# Altium PCB MotherBoardPCB.PcbDoc
Units mm, origin at the board's own origin, x right, y up, seen from the top; angles counter-clockwise.
Board outline 50 x 50 mm, 2 copper layers (Top Layer, Bottom Layer); 36 components, 30 nets, 147 pads, 50 vias.
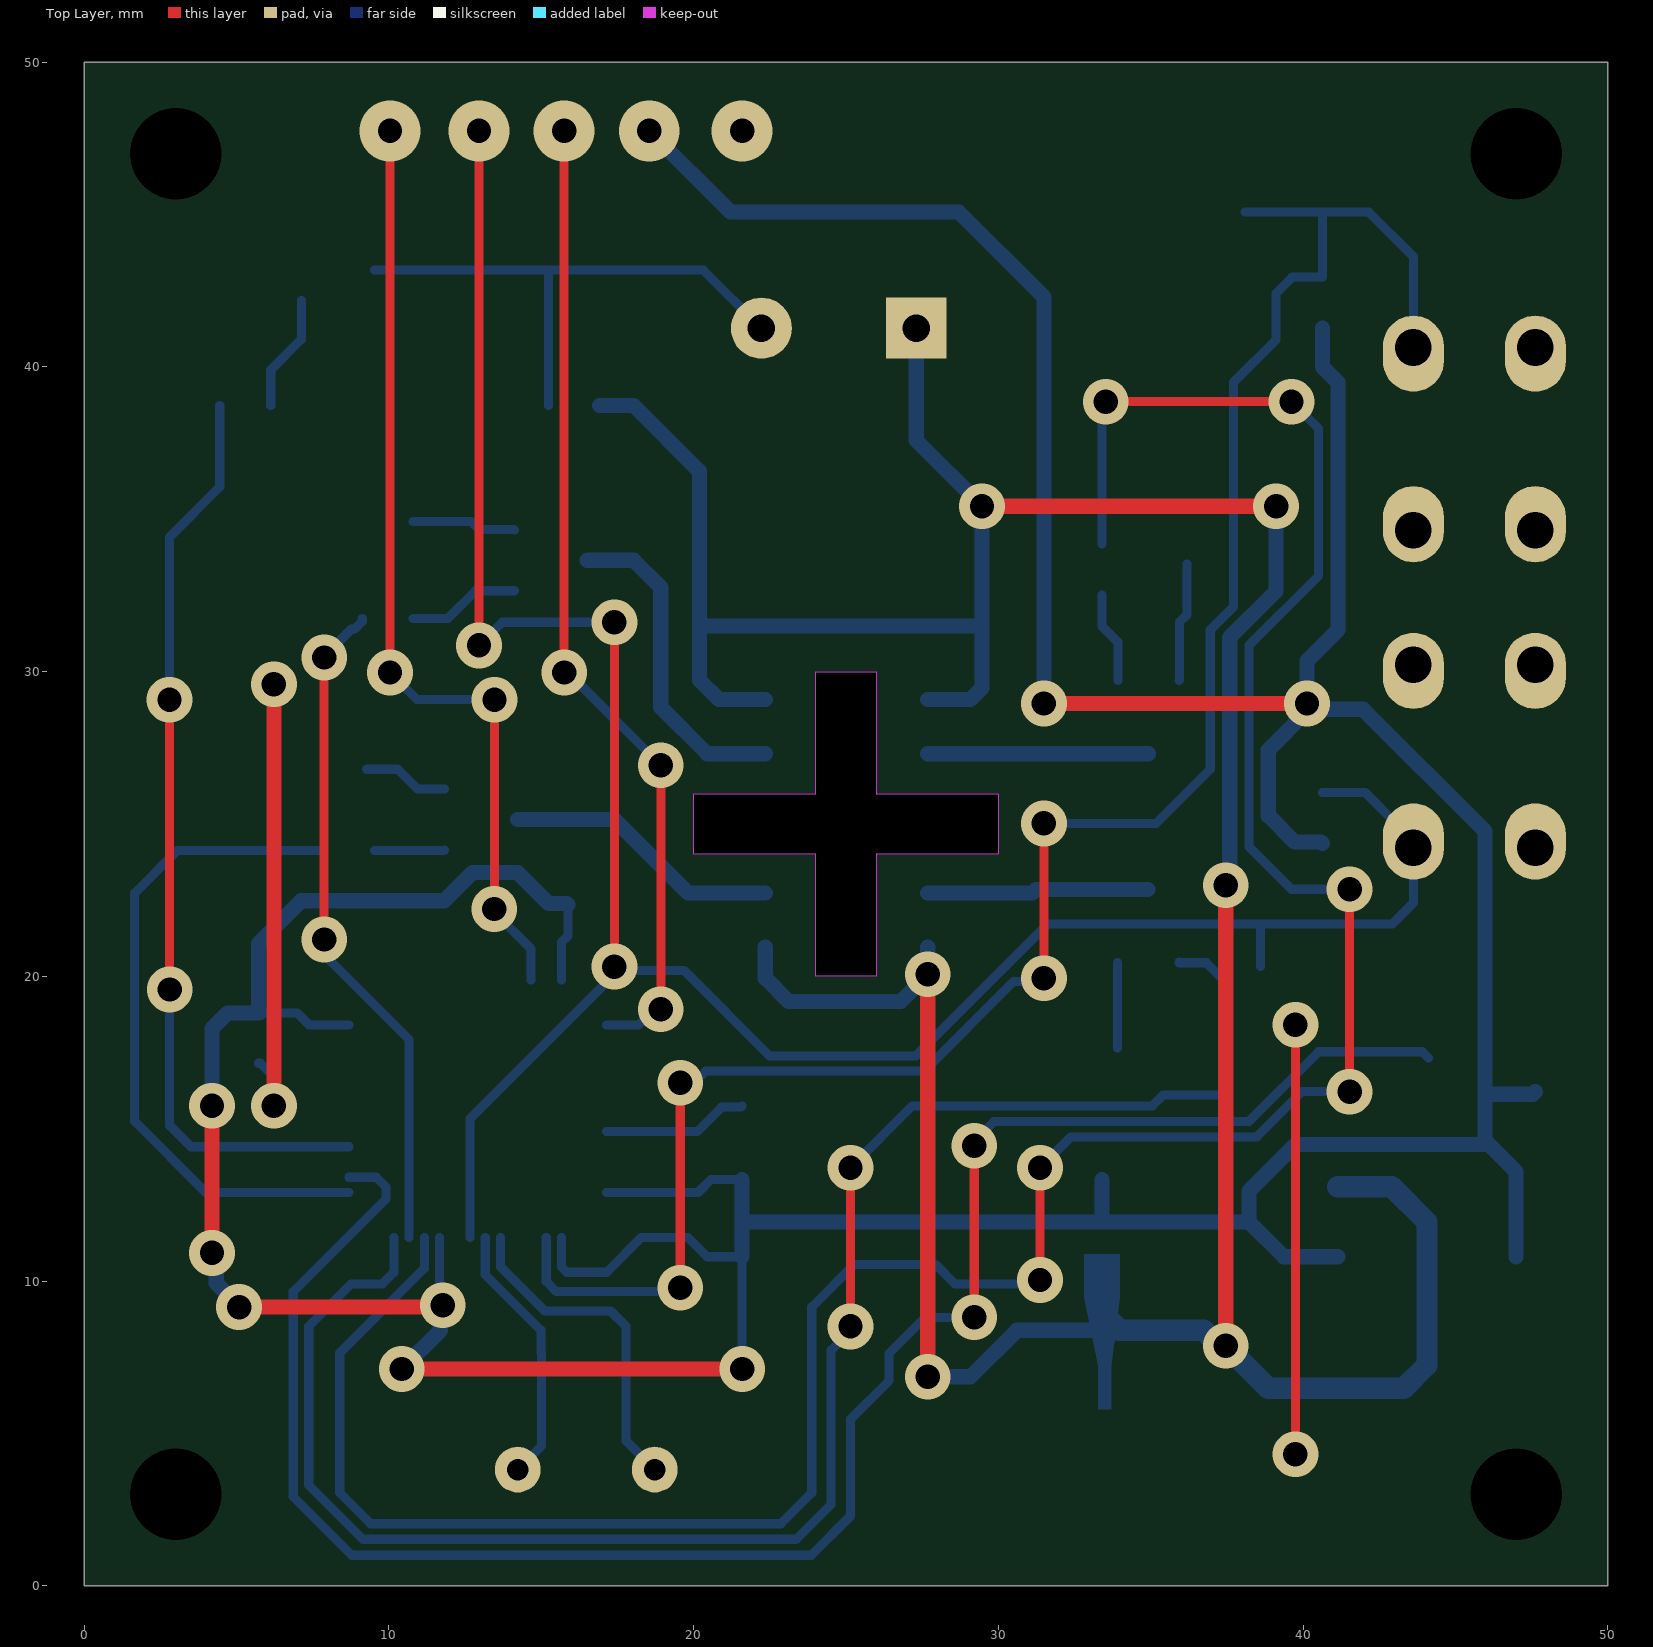
[diagram p0: Top Layer view]
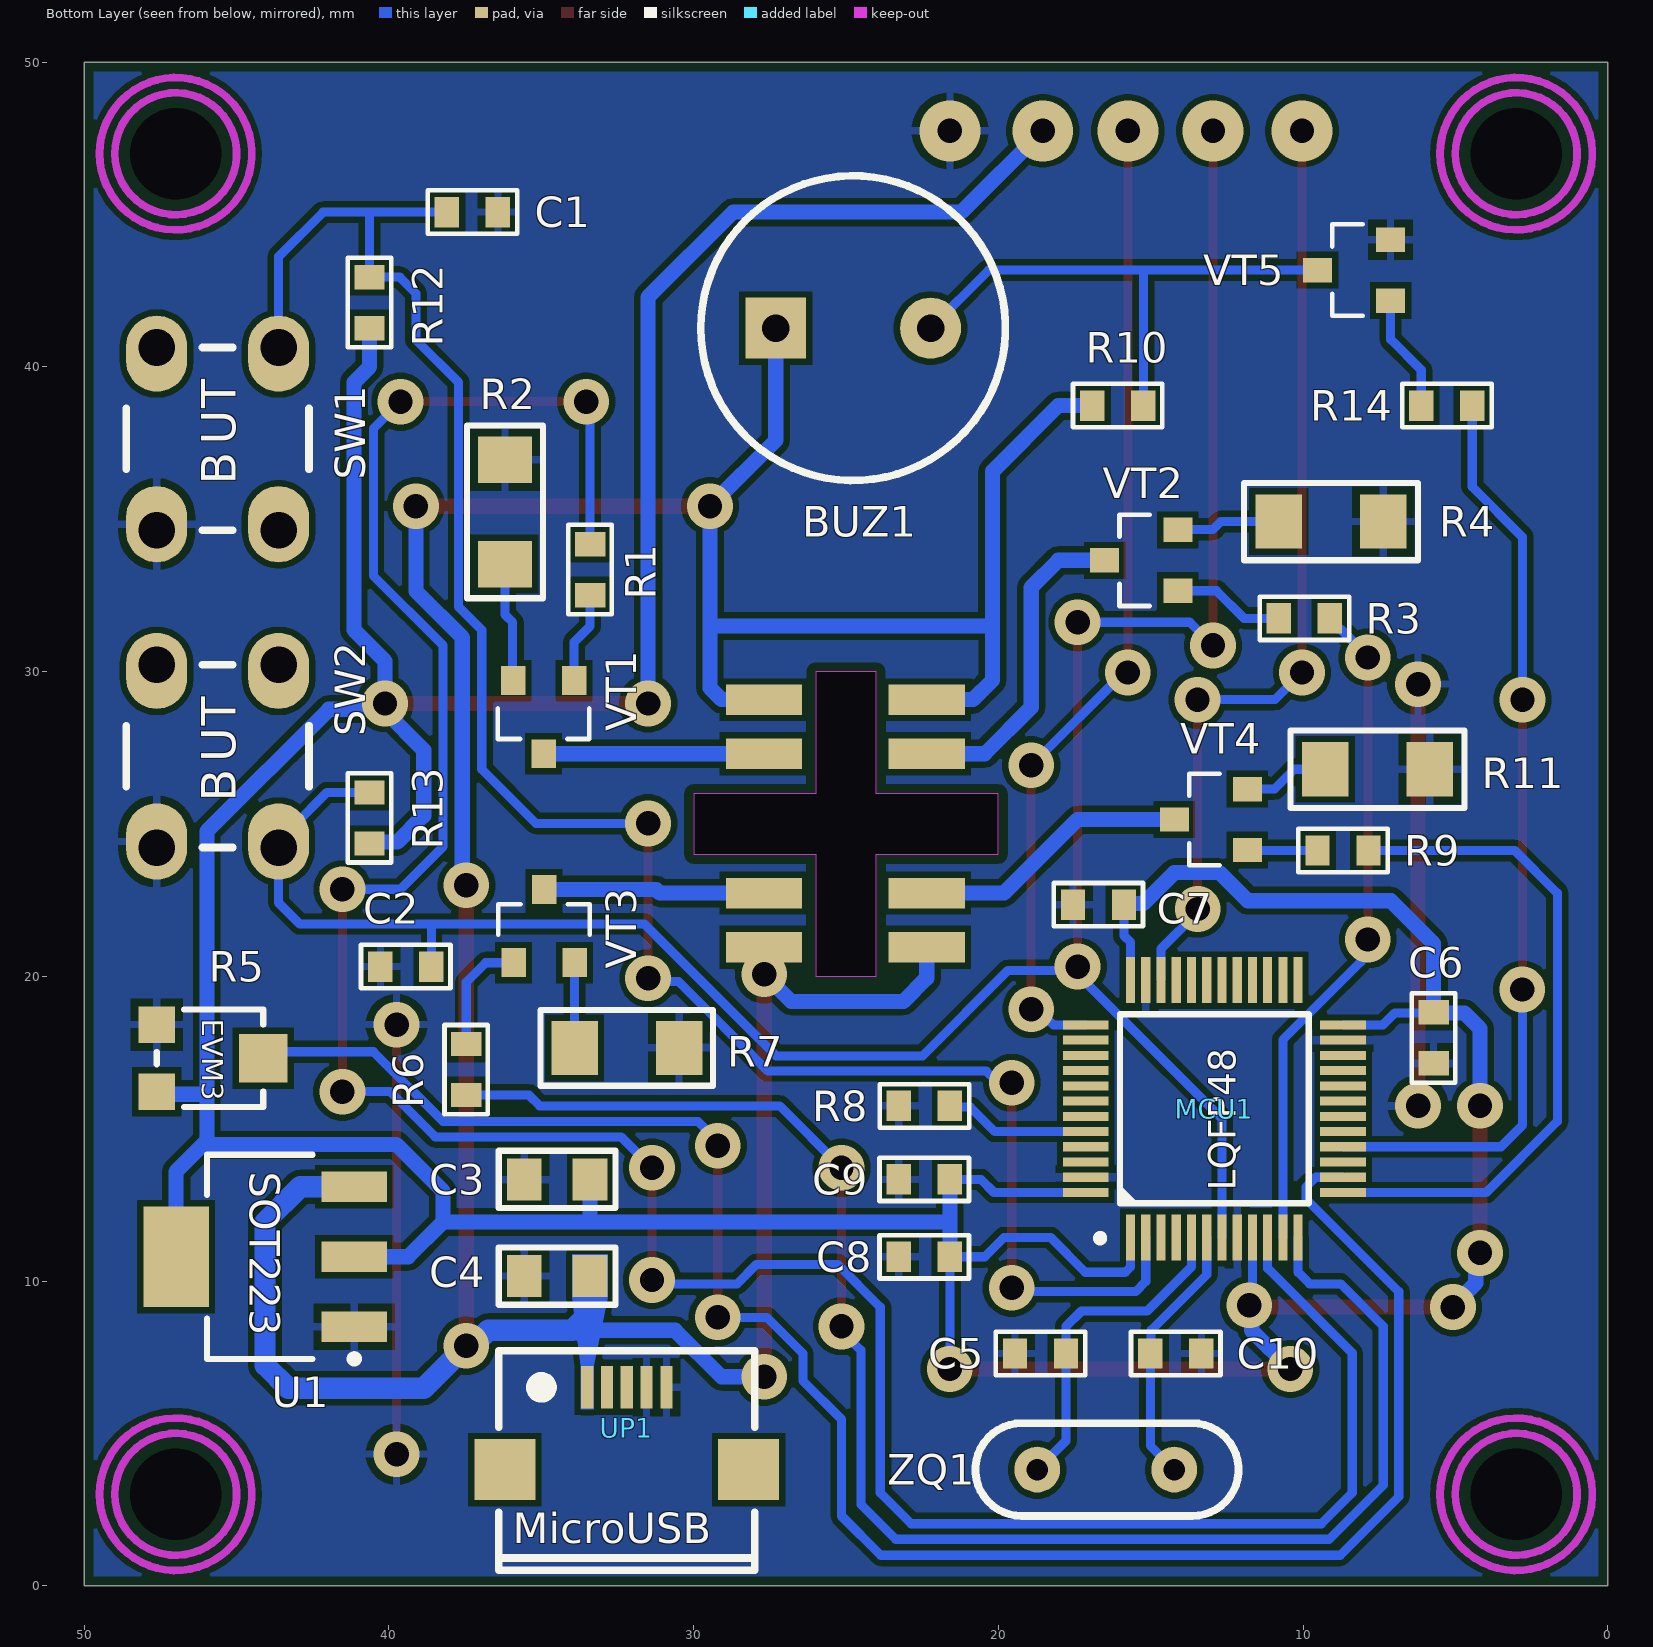
[diagram p1: Bottom Layer view, seen from below]

## Layer stack, top to bottom
Top Solder: solder mask 0.0102, Solder Resist, Dk 3.5
Top Layer: signal copper 0.0356
Dielectric 1: dielectric 0.32, FR-4, Dk 4.8
Bottom Layer: signal copper 0.0356
Bottom Solder: solder mask 0.0102, Solder Resist, Dk 3.5

## Board outline
0,0 0,50 50,50 50,0
cut-out: 24,20 24,24 20,24 20,26 24,26 24,30 26,30 26,26 30,26 30,24 26,24 26,20

## Design rules (kind name [scope] priority, off if disabled: settings)
BoardOutlineClearance [All] p1: gap=0.3 ignorepadtopadclearanceinfootprint=FALSE
Clearance [All] p1: gap=0.2 ignorepadtopadclearanceinfootprint=FALSE
FanoutControl Fanout_LCC [All] p1 off: bgadir=Out bgaviamode=Centered fanoutstyle=Auto fanoutdirection=Alternating viagrid=0.025 // Protel DXP Scope 1 Expression Was: IsLCC   Fanout_LCC (Default Rule)
FanoutControl Fanout_BGA [All] p2 off: bgadir=Out bgaviamode=Centered fanoutstyle=Auto fanoutdirection=Alternating viagrid=0.025 // Protel DXP Scope 1 Expression Was: IsBGA   Fanout_BGA (Default Rule)
FanoutControl Fanout_SOIC [All] p3 off: bgadir=Out bgaviamode=Centered fanoutstyle=Auto fanoutdirection=Alternating viagrid=0.025 // Protel DXP Scope 1 Expression Was: IsSOIC   Fanout_SOIC (Default Rule)
FanoutControl Fanout_Default [All] p4: bgadir=Out bgaviamode=Centered fanoutstyle=Auto fanoutdirection=Alternating viagrid=0.025 // Fanout_Default (Default Rule)
FanoutControl Fanout_Small [All] p5 off: bgadir=Out bgaviamode=Centered fanoutstyle=Auto fanoutdirection=Alternating viagrid=0.025 // Protel DXP Scope 1 Expression Was: (CompPinCount < 5)   Fanout_Small (Default Rule)
HoleSize [All] p1: absolutevalues=TRUE maxlimit=10 minlimit=0.025 maxpercent=80.000 minpercent=20.000
MinimumSolderMaskSliver [All] p1: minsoldermaskwidth=0
PolygonConnect [All] p1: connectstyle=Relief reliefconductorwidth=0.254 reliefentries=4 polygonreliefangle="90 Angle" airgapwidth=0.254
RoutingVias [All] p1: holewidth=0.8 width=1.5 viastyle="Through Hole" minholewidth=0.8 minwidth=1.5 maxholewidth=0.8 maxwidth=2
SilkToSilkClearance [All] p1: silktosilkclearance=0.1
SilkToSolderMaskClearance [All] p1 off: minsilkscreentomaskgap=0.254 clearancetoexposedcopper=TRUE // Protel DXP Scope 1 Expression Was: IsPad
SolderMaskExpansion [All] p1: expansion=0.102 istentingtop=FALSE
Width [All] p1: maxlimit=0.7 minlimit=0.3 preferedwidth=0.5
21 further rules are at their usual default settings.

## Components (designator, comment, footprint, x,y, rotation, side; value= is the part's Value field where it differs from the comment)
BUZ1 "BUZZER" BUZZER-5.08MM-D10.5MM 27.305,41.275 r180 bottom
C1 "100nF" C0603 36.425,45.085 r0 bottom
C2 "100nF" C0603 40.283,20.32 r180 bottom
C3 "100nF" C0805 35.56,10.16 r180 bottom
C4 "100nF" C0805 35.56,13.335 r180 bottom
C5 "32pF" C0603 17.78,7.62 r0 bottom
C6 "100nF" C0603 5.715,17.145 r90 bottom
C7 "100nF" C0603 17.55,22.352 r180 bottom
C8 "100nF" C0603 23.265,10.795 r180 bottom
C9 "100nF" C0603 23.265,13.335 r180 bottom
C10 "32pF" C0603 15.01,7.62 r180 bottom
MCU1 "STM32F103C8T6" LQFP48 12.91,15.655 r90 bottom
R1 "10K" R0603#1 33.401,34.187 r270 bottom
R2 "68" R1206 36.195,33.528 r90 bottom
R3 "10K" R0603#1 9.12,31.75 r0 bottom
R4 "68" R1206 10.795,34.925 r180 bottom
R5 "10K" EVM3 47.625,18.415 r270 bottom
R6 "10K" R0603#1 37.465,16.105 r90 bottom
R7 "68" R1206 33.909,17.653 r180 bottom
R8 "1K" R0603#2 21.587,15.748 r0 bottom
R9 "10K" R0603#2 7.847,24.13 r0 bottom
R10 "1K" R0603#1 16.915,38.735 r180 bottom
R11 "68" R1206 9.271,26.797 r180 bottom
R12 "10K" R0603#1 40.64,42.95 r270 bottom
R13 "10K" R0603#1 40.64,26.035 r270 bottom
R14 "1K" R0603#1 4.445,38.735 r0 bottom
SW1 "Custom" BUT-6.5X4.5MM 47.625,34.64 r90 bottom
SW2 "Custom" BUT-6.5X4.5MM 47.625,24.226 r90 bottom
U1 "LM1117MPX-3.3" SOT-223 44.065,10.795 r0 bottom
UP1 "Type A" USB-MICRO-F 33.495,6.51 r180 bottom
VT1 "2N2222" SOT-23-123 34.925,27.305 r270 bottom
VT2 "2N2222" SOT-23-123 16.51,33.655 r0 bottom
VT3 "2N2222" SOT-23-123 34.909,22.847 r90 bottom
VT4 "2N2222" SOT-23-123 14.224,25.146 r0 bottom
VT5 "2N2222" SOT-23-123 9.525,43.18 r0 bottom
ZQ1 "8MHz" HC-49 18.724,3.81 r180 bottom

## Footprints (in the part's own frame and the unit in brackets; to place one, negate y for a bottom-side part, rotate by r counter-clockwise, add the part's x,y. Pads: shape width x height; smd on the part's side, far side on the other; paste and mask are expansions set on the pad)
BUT-6.5X4.5MM [mm]
  oval 2.5x2 hole 1.2 copper offset 0.2,0: 1(0,0) 2(0,-4)
  oval 2.5x2 hole 1.2 copper offset -0.2,0: 3(6,-4) 4(6,0)
  silkscreen extent 0,-5 6,1, body extent -0.2,-5 6.2,1, height 4.6
BUZZER-5.08MM-D10.5MM [mm]
  rect 2x2 hole 0.9: 1(0,0)
  round 2 hole 0.9: 2(5.08,0)
  silkscreen extent -2.46,-5 7.54,5, body extent -2.76,-5.3 7.84,5.3, height 6
C0603 [mm]
  rect 0.8x1 smd: 1(0,0) 2(1.675,0)
  silkscreen extent -0.64,-0.71 2.3,0.71, body extent -0.05,-0.45 1.75,0.45, height 0.8
C0805 [mil]
  rect 45x54 smd: 1(0,0) 2(85,0)
  silkscreen extent -33,-37 118,37, body extent 1,-24 84,24, height 35
EVM3 [mm]
  rect 1.2x1.2 smd: 1(0,0) 3(2.2,0)
  rect 1.6x1.6 smd: 2(1.1,3.5)
  silkscreen extent -0.5,0 2.7,3.5
HC-49 [mm]
  round 1.5 hole 0.7: 1(0,0) 2(4.5,0)
  silkscreen extent -2.02,-1.52 6.6,1.52, body extent -2.15,-1.65 6.73,1.65, height 2.26
LQFP48 [mm]
  rect 1.5x0.3 smd mask+0.076: 1(-4.225,2.75) 2(-4.225,2.25) 3(-4.225,1.75) 4(-4.225,1.25) 5(-4.225,0.75) 6(-4.225,0.25) 7(-4.225,-0.25) 8(-4.225,-0.75) 9(-4.225,-1.25) 10(-4.225,-1.75) 11(-4.225,-2.25) 12(-4.225,-2.75) 25(4.225,-2.75) 26(4.225,-2.25) 27(4.225,-1.75) 28(4.225,-1.25) 29(4.225,-0.75) 30(4.225,-0.25) 31(4.225,0.25) 32(4.225,0.75) 33(4.225,1.25) 34(4.225,1.75) 35(4.225,2.25) 36(4.225,2.75)
  rect 0.3x1.5 smd mask+0.076: 13(-2.75,-4.225) 14(-2.25,-4.225) 15(-1.75,-4.225) 16(-1.25,-4.225) 17(-0.75,-4.225) 18(-0.25,-4.225) 19(0.25,-4.225) 20(0.75,-4.225) 21(1.25,-4.225) 22(1.75,-4.225) 23(2.25,-4.225) 24(2.75,-4.225) 37(2.75,4.225) 38(2.25,4.225) 39(1.75,4.225) 40(1.25,4.225) 41(0.75,4.225) 42(0.25,4.225) 43(-0.25,4.225) 44(-0.75,4.225) 45(-1.25,4.225) 46(-1.75,4.225) 47(-2.25,4.225) 48(-2.75,4.225)
  silkscreen extent -4.36,-3.1 3.1,3.86, body extent -4.5,-4.5 4.5,4.5, height 1.6
R0603#1 [mm]
  rect 0.8x1 smd: 1(0,0) 2(1.675,0)
  silkscreen extent -0.64,-0.71 2.3,0.71, body extent 0,-0.39 1.57,0.4, height 0.5
R0603#2 [mm]
  rect 0.8x1 smd: 1(0.003,0) 2(1.678,0)
  silkscreen extent -0.63,-0.71 2.3,0.71, body extent 0,-0.39 1.57,0.4, height 0.5
R1206 [mil]
  rect 60x70 smd: 1(0,0) 2(135,0)
  silkscreen extent -44,-49 179,49, body extent 6,-31 129,31, height 28
SOT-23-123 [mm]
  rect 0.95x0.8 smd: 1(0,0) 2(-2.4,1) 3(-2.4,-1)
  silkscreen extent -1.49,-1.5 -0.49,1.5, body extent -2.5,-1.5 0.1,1.5, height 1.15
SOT-223 [mm]
  rect 2.15x1 smd: 1(-2.925,2.3) 2(-2.925,0) 3(-2.925,-2.3)
  rect 2.15x3.3 smd: 4(2.925,0)
  silkscreen extent -3.05,-3.35 1.91,3.47, body extent -3.5,-3.35 3.5,3.35, height 1.7
USB-MICRO-F [mm]
  rect 0.4x1.4 smd: 1(0,0) 2(0.65,0) 3(1.3,0) 4(1.95,0) 5(2.6,0)
  rect 2x2 smd: 5-5(-2.7,-2.7) 5-5(5.3,-2.7)
  silkscreen extent -2.9,-6 5.5,1.2, body extent -2.6,-4.8 5.2,0.2, height 2.68

## Part data
BUZ1: library part Buzzer, Name=BUZZER
C1 C2 C3 C4 C5 C6 C7 C8 C9 C10: library part Cap
MCU1: library part STM32F103C8Tx, Name=STM32F103C8T6
R1 R2 R3 R4 R6 R7 R8 R9 R10 R11 R12 R13 R14: library part Res
R5: library part "Res Adj"
SW1 SW2: library part Button, Name=Custom
U1: library part LM1117, Name=LM1117MPX-3.3
UP1: library part USB, Type="Type A"
VT1 VT2 VT3 VT4 VT5: library part NPN_CBE, Name=2N2222
ZQ1: library part Crystall

## Free pads (board coordinates)
  rect 2.5x1 smd far side: 6(22.352,20.955) 6(27.686,20.955) ""(22.352,22.733) ""(22.352,27.305) ""(22.352,29.083) ""(27.686,22.733) ""(27.686,27.305) ""(27.686,29.083)
  round 2 hole 3: ""(3,3) ""(3,47) ""(47,3) ""(47,47)

## Via types
v1: diameter 1.5, hole 0.8, Top Layer to Bottom Layer, tented both sides, 45 vias
v2: diameter 2, hole 0.8, Top Layer to Bottom Layer, 5 vias

## Nets (pads, with @x,y where several pads share a name; then routed paths per layer and width w, separated by ;. In a path a pad name is that pad's centre, name@x,y a point inside that pad or via, vN(x,y) a via of type N, cw(c..) or ccw(c..) an arc to the next point about the centre after c; other vN are vias at no path point)
+3.3V: C4.2 C6.2 C7.2 C8.2 C9.2 MCU1.1 MCU1.9 MCU1.24 MCU1.36 MCU1.48 R5.3 R12.2 R13.2 U1.2 U1.4 | length 183.1
  Top Layer w0.3: v1@11.712,9.144 v1(11.768,9.2)
  Top Layer w0.5: v1(4.191,10.922) v1(4.191,15.748) ; v1(5.08,9.144) v1@11.712,9.144 ; v1(10.414,7.112) v1(21.59,7.112) ; v1(31.496,28.956) v1(40.132,28.956)
  Bottom Layer w0.3: C6.2 5.739,18.796 6.985,18.796 7.376,18.405 MCU1.24 ; MCU1.9 11.66,9.308 v1(11.768,9.2) ; MCU1.1 15.66,10.463 15.836,10.287 17.145,10.287 18.288,11.43 19.812,11.43 20.447,10.795 C8.2 v1(21.59,7.112) ; MCU1.36 15.66,21.121 15.875,21.336 C7.2 ; MCU1.48 20.144,12.905 20.574,13.335 C9.2
  Bottom Layer w0.5: v1(4.191,10.922) 4.327,10.786 4.327,9.937 5.08,9.184 v1(5.08,9.144) ; v1(4.191,15.748) 4.191,18.288 4.699,18.796 C6.2@5.739,18.796 ; C6.2 5.715,21.082 7.112,22.479 11.811,22.479 12.743,23.411 14.224,23.411 15.24,22.395 15.832,22.395 C7.2 ; v1(10.414,7.112) 11.684,8.382 11.684,9.116 v1(11.768,9.2) ; v2(18.542,47.752) 21.209,45.085 28.702,45.085 31.496,42.291 v1(31.496,28.956) ; C8.2 21.59,12.065 ; C9.2 21.59,12.065 ; C4.2 33.401,11.938 ; R13.2 40.592,24.408 39.727,24.408 38.862,25.273 38.862,27.432 v1@40.132,28.702 ; R12.2 40.64,40.005 41.148,39.497 41.148,31.369 40.132,30.353 v1(40.132,28.956) v1@40.132,28.702 ; U1.2 39.37,10.795 38.227,11.938 ; 45.974,14.478 39.751,14.478 38.227,12.954 38.227,11.938 ; U1.4 46.99,13.589 45.974,14.605 45.974,16.129 ; R5.3 47.539,16.129 45.974,16.129 ; 21.59,12.065 21.717,11.938 33.401,11.938 ; 33.401,11.938 38.227,11.938 ; v1@40.132,28.702 40.195,28.765 41.974,28.765 45.974,24.765 45.974,16.129
+5V: BUZ1.1 C3.2 pad.6 pad.@22.352,29.083 pad.@27.686,29.083 R10.1 U1.3 UP1.1 | length 126.7
  Top Layer w0.5: v1(27.686,6.858) v1(27.686,20.066) ; v1(29.464,35.433) v1(39.116,35.433) ; v1(37.465,7.874) v1(37.465,22.987)
  Bottom Layer w0.3: UP1.1 33.495,7.888 33.989,8.382
  Bottom Layer w0.5: R10.1 18.034,38.735 20.193,36.576 20.193,31.496 ; pad.6@22.352,20.955 22.352,19.939 23.114,19.177 26.797,19.177 v1(27.686,20.066) pad.6@27.686,20.955 ; pad.@22.352,29.083 20.828,29.083 20.193,29.718 20.193,31.496 ; BUZ1.1 27.305,37.592 v1(29.464,35.433) 29.464,31.496 ; v1(27.686,6.858) 29.083,6.858 30.607,8.382 33.989,8.382 ; pad.@27.686,29.083 29.083,29.083 29.464,29.464 29.464,31.496 ; v1(37.465,22.987) 37.592,23.114 37.592,31.115 39.116,32.639 v1(39.116,35.433) ; 20.193,31.496 29.464,31.496
  Bottom Layer w0.7: C3.2 33.477,10.084 33.477,8.894 33.989,8.382 36.741,8.382 37.249,7.874 v1(37.465,7.874) 38.862,6.477 43.307,6.477 44.069,7.239 44.069,11.938 42.912,13.095 U1.3
ADC1_ADJ: MCU1.14 R5.2 | length 63.5
  Top Layer w0.3: v1(29.21,8.806) v1(29.21,14.443)
  Bottom Layer w0.3: MCU1.14 9.582,13.405 9.906,13.081 9.906,12.7 6.858,9.652 6.858,2.921 8.779,1 23.86,1 25.146,2.286 25.146,5.461 26.416,6.731 26.416,7.623 27.599,8.806 v1(29.21,8.806) ; v1(29.21,14.443) 29.21,14.589 29.861,15.24 38.227,15.24 40.513,17.526 43.914,17.526 R5.2
BLUE: pad.@27.686,22.733 VT3.1 | length 7.3
  Bottom Layer w0.5: pad.@27.686,22.733 31.115,22.733 31.229,22.847 VT3.1
BOOT: MCU1.44 R8.1 | length 4.8
  Bottom Layer w0.3: MCU1.44 20.112,14.905 20.916,15.709 21.551,15.709 R8.1
BUT: C1.2 MCU1.2 R12.1 SW1.3 | length 66.9
  Top Layer w0.3: v1(19.558,9.779) v1(19.558,16.51) ; v1(31.496,19.939) v1(31.496,25.019)
  Bottom Layer w0.3: MCU1.2 15.16,9.986 15.494,9.652 19.431,9.652 v1(19.558,9.779) ; v1(19.558,16.51) 19.788,16.74 20.243,16.74 20.394,16.891 27.559,16.891 30.503,19.835 31.392,19.835 v1(31.496,19.939) ; v1(31.496,25.019) 35.179,25.019 36.957,26.797 36.957,31.369 37.719,32.131 37.719,39.497 39.116,40.894 39.116,42.418 39.648,42.95 R12.1 40.64,45.085 ; C1.2 40.64,45.085 ; SW1.3 43.625,43.624 42.164,45.085 40.64,45.085
BUZ: MCU1.16 R14.1 | length 30.5
  Top Layer w0.3: v1(2.794,29.083) 2.794,19.574 v1(2.802,19.566)
  Bottom Layer w0.3: v1(2.794,29.083) 2.794,34.417 4.445,36.068 R14.1 ; v1(2.802,19.566) 2.794,19.558 2.794,15.113 3.502,14.405 MCU1.16
GND: C1.1 C2.1 C3.1 C4.1 C5.2 C6.1 C7.1 C8.1 C9.1 C10.2 MCU1.8 MCU1.23 MCU1.35 MCU1.47 R2.2 R4.2 R5.1 R7.2 R8.2 R11.2 SW1.1 SW2.1 U1.1 UP1.4 UP1.5 VT5.3 | length 28.4
  Top Layer w0.3: v1(39.751,4.318) v1(39.751,18.415)
  Top Layer w0.5: v1(6.223,15.748) v1(6.223,29.591)
  Bottom Layer w0.3: C6.1 5.78,17.145 C6.1@6.03,16.895
  other v2: 21.59,47.752
GREEN: pad.@22.352,27.305 VT2.1 | length 10.8
  Bottom Layer w0.5: VT2.1 18.034,33.655 18.923,32.766 18.923,28.829 20.447,27.305 pad.@22.352,27.305
NetBUZ1_2: BUZ1.2 R10.2 VT5.1 | length 17.9
  Bottom Layer w0.3: VT5.1 15.24,43.18 ; R10.2 15.24,43.18 ; BUZ1.2 20.32,43.18 15.24,43.18
NetR1_2: R1.2 VT1.2 | length 3
  Bottom Layer w0.3: R1.2 33.401,31.496 33.925,30.972 VT1.2
NetR2_1: R2.1 VT1.3 | length 3.9
  Bottom Layer w0.3: VT1.3 35.941,29.721 35.941,31.623 36.195,31.877 R2.1
NetR3_2: R3.2 VT2.2 | length 3.7
  Bottom Layer w0.3: R3.2 11.938,31.75 12.843,32.655 VT2.2
NetR4_1: R4.1 VT2.3 | length 3.4
  Bottom Layer w0.3: R4.1 12.7,34.925 12.954,34.671 14.094,34.671 VT2.3
NetR6_2: R6.2 VT3.2 | length 3.8
  Bottom Layer w0.3: VT3.2@35.925,20.46 35.938,20.447 36.83,20.447 37.465,19.812 R6.2
NetR7_1: R7.1 VT3.3 | length 2.8
  Bottom Layer w0.3: R7.1 VT3.3
NetR9_2: R9.2 VT4.2 | length 2.3
  Bottom Layer w0.3: R9.2 11.808,24.13 VT4.2
NetR11_1: R11.1 VT4.3 | length 2.8
  Bottom Layer w0.3: R11.1 10.287,26.797 10.938,26.146 VT4.3
NetR14_2: R14.2 VT5.2 | length 3.9
  Bottom Layer w0.3: R14.2 6.12,39.902 7.125,40.907 VT5.2
NRST: C2.2 MCU1.7 R13.1 SW2.2 | length 79.4
  Top Layer w0.3: v1(12.954,30.861) v2(12.954,47.752) ; v1(17.399,20.32) v1(17.399,31.623)
  Bottom Layer w0.3: MCU1.7 12.66,15.327 v1@17.526,20.193 ; v1(12.954,30.861) 13.716,31.623 v1(17.399,31.623) ; v1(17.399,20.32) v1@17.526,20.193 ; C2.2 38.608,21.717 ; R13.1 42.037,26.035 SW2.2@43.125,24.947 ; SW2.2 43.625,22.416 42.926,21.717 38.608,21.717 ; v1@17.526,20.193 19.685,20.193 22.487,17.391 27.297,17.391 31.623,21.717 38.608,21.717
RCC_OSC_IN: C5.1 MCU1.5 ZQ1.1 | length 11
  Bottom Layer w0.3: MCU1.5 13.66,10.47 15.113,9.017 17.272,9.017 17.78,8.509 C5.1 17.78,4.754 ZQ1.1
RCC_OSC_OUT: C10.1 MCU1.6 ZQ1.2 | length 8.7
  Bottom Layer w0.3: MCU1.6 13.16,10.208 14.986,8.382 14.986,7.644 C10.1 15.01,4.596 ZQ1.2
RED: pad.@27.686,27.305 VT1.1 | length 7.2
  Bottom Layer w0.5: pad.@27.686,27.305 VT1.1
STAR: pad.@22.352,22.733 VT4.1 | length 9.1
  Bottom Layer w0.5: VT4.1 17.399,25.146 19.812,22.733 pad.@22.352,22.733
SWCLK: MCU1.37 | length 32.2
  Top Layer w0.3: v1(15.748,29.972) v2(15.748,47.752) ; v1(18.923,18.923) v1(18.923,26.924)
  Bottom Layer w0.3: v1(15.748,29.972) 15.875,29.972 v1(18.923,26.924) ; MCU1.37 18.193,18.405 18.711,18.923 v1(18.923,18.923)
SWDIO: MCU1.34 | length 31.3
  Top Layer w0.3: v1(10.033,29.972) v2(10.033,47.752) ; v1(13.458,22.211) 13.462,22.214 v1(13.462,29.083)
  Bottom Layer w0.3: v1(10.033,29.972) 10.922,29.083 v1(13.462,29.083) ; v1(13.458,22.211) 13.458,22.102 14.66,20.9 MCU1.34
TIM2_CH1: MCU1.10 R1.1 | length 92.5
  Top Layer w0.3: v1(31.369,10.033) v1(31.369,13.716) ; v1(33.528,38.862) v1(39.624,38.862) ; v1(41.529,16.215) v1(41.529,22.86)
  Bottom Layer w0.3: MCU1.10 11.16,10.414 8.382,7.636 8.382,3.048 9.398,2.032 22.86,2.032 23.876,3.048 23.876,9.144 25.273,10.541 27.94,10.541 28.575,9.906 31.242,9.906 v1(31.369,10.033) ; v1(31.369,13.716) 32.385,14.732 38.481,14.732 39.964,16.215 v1(41.529,16.215) ; R1.1 33.401,38.735 v1(33.528,38.862) ; v1(39.624,38.862) 40.513,37.973 40.513,33.147 38.227,30.861 38.227,24.257 39.624,22.86 v1(41.529,22.86)
TIM2_CH2: MCU1.11 R3.1 | length 22.1
  Top Layer w0.3: v1(7.872,21.207) 7.872,30.465 v1(7.874,30.466)
  Bottom Layer w0.3: v1(7.872,21.207) 8.102,20.978 8.102,20.473 10.66,17.915 MCU1.11 ; v1(7.874,30.466) 7.874,30.504 8.77,31.4 8.87,31.4 9.12,31.65 R3.1
TIM2_CH3: MCU1.12 R6.1 | length 52.9
  Top Layer w0.3: v1(25.146,8.509) v1(25.146,13.716)
  Bottom Layer w0.3: MCU1.12 10.16,10.287 9.779,9.906 8.763,9.906 7.366,8.509 7.366,3.302 9.144,1.524 23.368,1.524 24.511,2.667 24.511,7.733 25.146,8.368 v1(25.146,8.509) ; v1(25.146,13.716) 27.178,15.748 35.052,15.748 35.409,16.105 R6.1
TIM2_CH4: MCU1.13 R9.1 | length 22.3
  Bottom Layer w0.3: R9.1 3.048,24.13 1.651,22.733 1.651,15.24 3.986,12.905 MCU1.13
pads on no net: MCU1.3 MCU1.4 MCU1.15 MCU1.17 MCU1.18 MCU1.19 MCU1.20 MCU1.21 MCU1.22 MCU1.25 MCU1.26 MCU1.27 MCU1.28 MCU1.29 MCU1.30 MCU1.31 MCU1.32 MCU1.33 MCU1.38 MCU1.39 MCU1.40 MCU1.41 MCU1.42 MCU1.43 MCU1.45 MCU1.46 SW1.2 SW1.4 SW2.3 SW2.4 UP1.2 UP1.3 UP1.5-5

## Polygon pours and split planes (outlines as drawn)
GND on Bottom Layer "GND_L02_P000" (solid, pour order 0): 0,0 50,0 50,50 0,50

## Keep-outs
Bottom Layer:
  circle w0.254: c3,47 r2
  circle w0.254: c47,47 r2
  circle w0.254: c47,3 r2
  circle w0.254: c3,3 r2.5
  circle w0.254: c3,47 r2.5
  circle w0.254: c47,47 r2.5
  circle w0.254: c47,3 r2.5
  circle w0.254: c3,3 r2

## Other copper
Bottom Layer:
  region net +5V: 33.274,5.791 33.706,5.791 33.706,7.214 33.985,9.474 33.985,10.871 32.817,10.871 32.817,9.474 33.274,7.214

## Silkscreen, mask and mechanical layers (free items; w line width, h text height)
Board:
  lines w0.5: 20,24 24,24 24,20 26,20 26,24 30,24 30,26 26,26 26,30 24,30 24,26 20,26 20,24
  lines w0.6: 0,0 0,50 50,50 50,0 0,0
  lines w1.27: 202.565,164.211 202.692,164.084
Draw:
  circle w0.5: c3,3 r2.5
  circle w0.5: c3,47 r2.5
  circle w0.5: c47,47 r2.5
  circle w0.5: c47,3 r2.5

## Text inside footprints (layer, text, board x,y; h text height)
MCU1: Bottom Overlay "LQFP48" at 12.21,12.955 h0.9 r270
R5: Bottom Overlay "EVM3" at 46.125,18.615 h0.7 r90
SW1: Bottom Overlay "T" at 45.025,38.64 h1.14 r270; Bottom Overlay "U" at 45.025,37.44 h1.14 r270; Bottom Overlay "B" at 45.025,36.14 h1.14 r270
SW2: Bottom Overlay "T" at 45.025,28.226 h1.14 r270; Bottom Overlay "U" at 45.025,27.026 h1.14 r270; Bottom Overlay "B" at 45.025,25.726 h1.14 r270
U1: Bottom Overlay "SOT223" at 44.573,13.589 h1 r90
UP1: Bottom Overlay "MicroUSB" at 35.941,1.397 h1